# EAGLE board Mosfet H-Bridge (EAGLE 7.6.0)
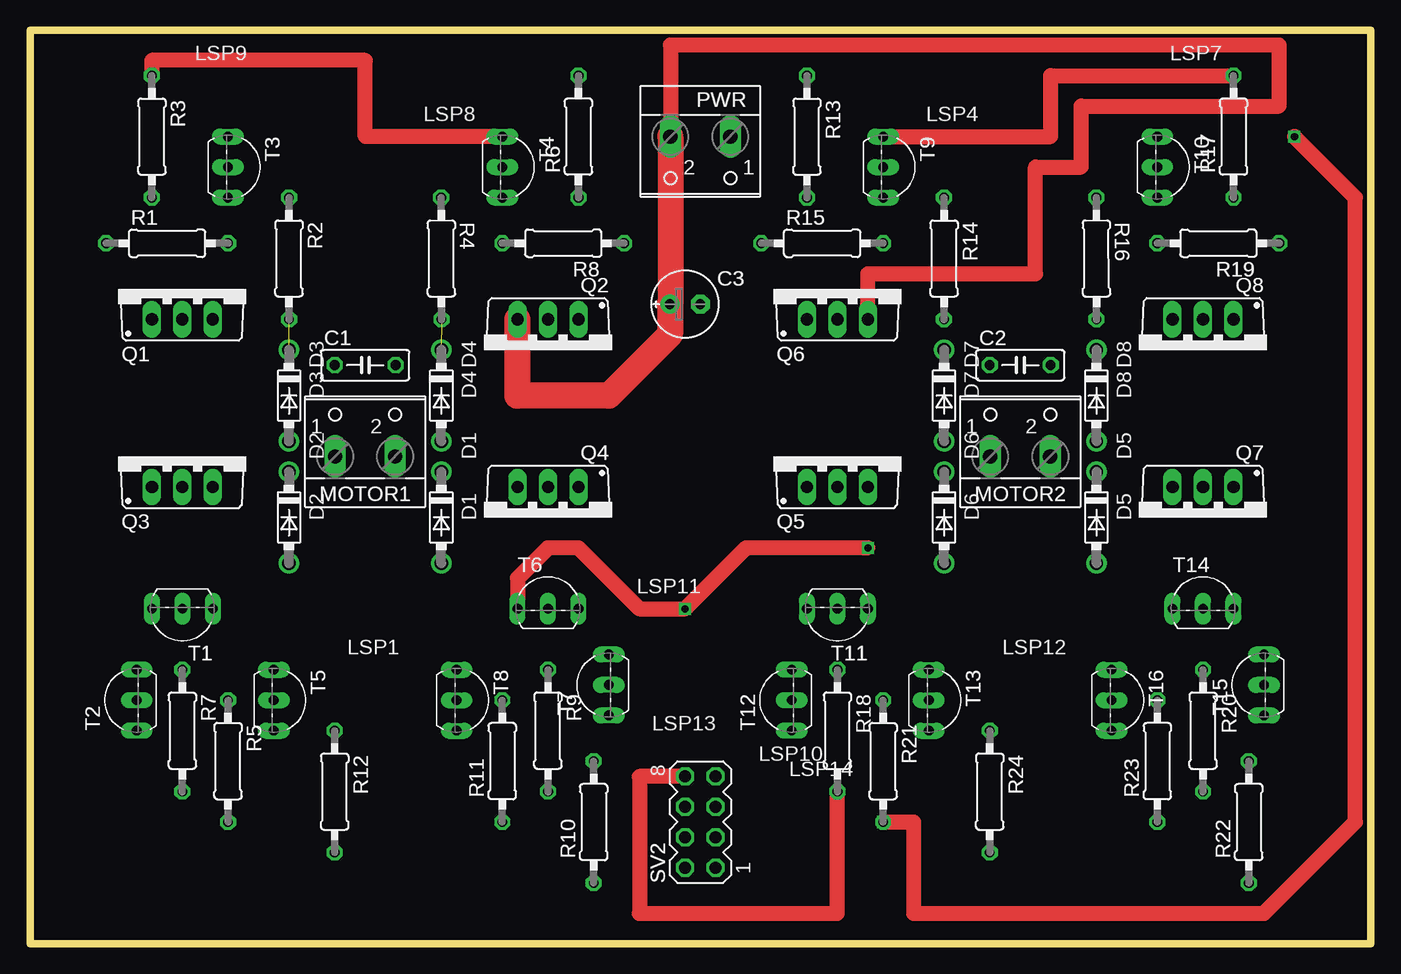
[diagram p0: board, top side]
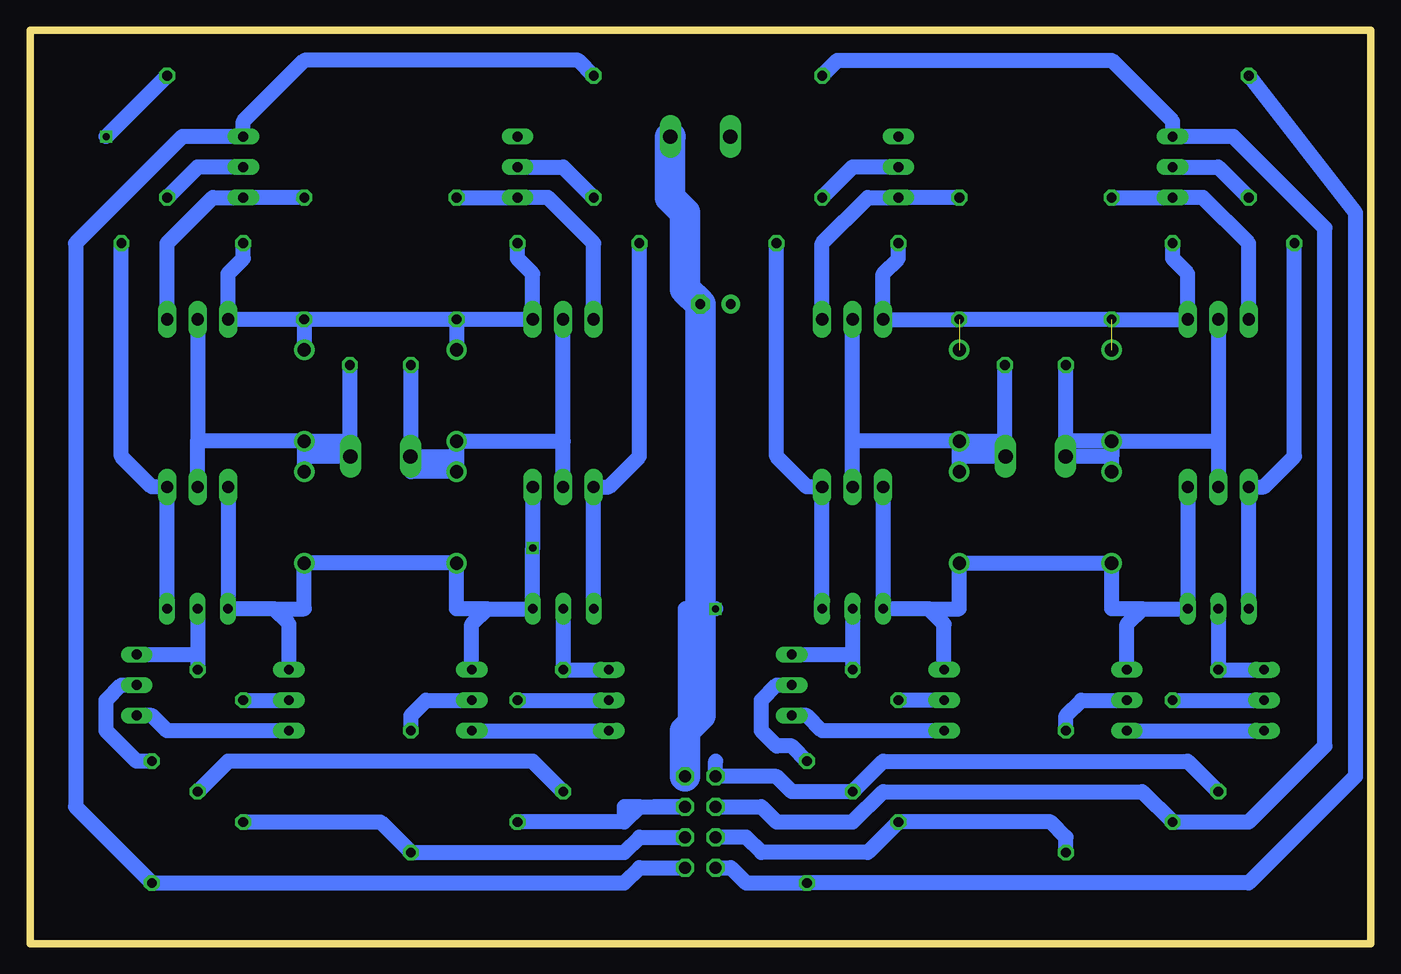
[diagram p1: board, bottom side, seen from below]

Size 111.76 x 76.2 mm. Coordinates in mm from the lower left corner, seen from the top.
Outline: 0,76.2 0,0 111.76,0 111.76,76.2 0,76.2
Copper layers (1*16): Top 0.035mm / dielectric 1.5mm / Bottom 0.035mm
Design rules "default": minimum track width 10mil, minimum drill 24mil, track to track 8mil, track to pad 8mil, pad to pad 8mil, via to via 8mil, smd to smd 8mil, copper to edge 40mil, drill to drill 8mil, minimum pad ring 10mil, minimum via ring 8mil, stop-mask expansion 4mil, vias tented up to drill 0mil, thermal gap 10mil
Net classes: 1 Thick: width 1.016 mm, drill 0.508 mm, clearance 0.508 mm

## Footprints (pad centres in the part's own frame; a part is rotated, then mirrored left to right if it is on the bottom)
C050-025X075 = drill 0.813 octagon: 1 -2.54,0; 2 2.54,0
E2,5-6E = drill 0.813 pad 1.575: + -1.27,0 | drill 0.813 pad 1.575 octagon: - 1.27,0
DO41-7.6 = drill 1.1 pad 1.7: A 3.81,0; C -3.81,0
W237-102 = drill 1.194 long: 1 -2.5,-1.27; 2 2.5,-1.27
TO220BV = drill 1.016 long: D 0,-2.54; G -2.54,-2.54; S 2.54,-2.54
0207/10 = drill 0.813 octagon: 1 -5.08,0; 2 5.08,0
MA04-2 = drill 1.016 octagon: 1 -3.81,-1.27; 2 -3.81,1.27; 3 -1.27,-1.27; 4 -1.27,1.27; 5 1.27,-1.27; 6 1.27,1.27; 7 3.81,-1.27; 8 3.81,1.27
TO92-EBC = drill 0.813 long: B 0,-1.27; C 2.54,-1.27; E -2.54,-1.27

## Placement (x,y rotation side)
C1  [C050-025X075]  27.94,48.26 0 top
C2  [C050-025X075]  82.55,48.26 0 top
C3  [E2,5-6E]  54.61,53.34 0 top
D1  1N5817-B  [DO41-7.6]  34.29,35.56 270 top
D2  1N5817-B  [DO41-7.6]  21.59,35.56 270 top
D3  1N5817-B  [DO41-7.6]  21.59,45.72 270 top
D4  1N5817-B  [DO41-7.6]  34.29,45.72 270 top
D5  1N5817-B  [DO41-7.6]  88.9,35.56 270 top
D6  1N5817-B  [DO41-7.6]  76.2,35.56 270 top
D7  1N5817-B  [DO41-7.6]  76.2,45.72 270 top
D8  1N5817-B  [DO41-7.6]  88.9,45.72 270 top
MOTOR1  [W237-102]  27.94,41.91 0 top
MOTOR2  [W237-102]  82.55,41.91 0 top
PWR  [W237-102]  55.88,66.04 180 top
Q1  IRF9640  [TO220BV]  12.7,54.61 0 top
Q2  IRF9640  [TO220BV]  43.18,49.53 180 top
Q3  IRF530N  [TO220BV]  12.7,40.64 0 top
Q4  IRF530N  [TO220BV]  43.18,35.56 180 top
Q5  IRF530N  [TO220BV]  67.31,40.64 0 top
Q6  IRF9640  [TO220BV]  67.31,54.61 0 top
Q7  IRF530N  [TO220BV]  97.79,35.56 180 top
Q8  IRF9640  [TO220BV]  97.79,49.53 180 top
R1  10K  [0207/10]  11.43,58.42 0 top
R2  10K  [0207/10]  21.59,57.15 270 top
R3  10K  [0207/10]  10.16,67.31 270 top
R4  10K  [0207/10]  34.29,57.15 270.1 top
R5  10K  [0207/10]  16.51,15.24 270 top
R6  10K  [0207/10]  45.72,67.31 90 top
R7  10K  [0207/10]  12.7,17.78 270 top
R8  10K  [0207/10]  44.45,58.42 180 top
R9  10K  [0207/10]  43.18,17.78 270 top
R10  10K  [0207/10]  46.99,10.16 90 top
R11  10K  [0207/10]  39.37,15.24 90 top
R12  10K  [0207/10]  25.4,12.7 270 top
R13  10K  [0207/10]  64.77,67.31 270 top
R14  10K  [0207/10]  76.2,57.15 270 top
R15  10K  [0207/10]  66.04,58.42 0 top
R16  10K  [0207/10]  88.9,57.15 270.1 top
R17  10K  [0207/10]  100.33,67.31 90 top
R18  10K  [0207/10]  67.31,17.78 270 top
R19  10K  [0207/10]  99.06,58.42 180 top
R20  10K  [0207/10]  97.79,17.78 270 top
R21  10K  [0207/10]  71.12,15.24 270 top
R22  10K  [0207/10]  101.6,10.16 90 top
R23  10K  [0207/10]  93.98,15.24 90 top
R24  10K  [0207/10]  80.01,12.7 270 top
SV2  [MA04-2]  55.88,10.16 90 top
T1  [TO92-EBC]  12.7,26.67 180 top
T2  [TO92-EBC]  7.62,20.32 90 top
T3  [TO92-EBC]  17.78,64.77 270 top
T4  [TO92-EBC]  40.64,64.77 270 top
T5  [TO92-EBC]  21.59,20.32 270 top
T6  [TO92-EBC]  43.18,29.21 0 top
T7  [TO92-EBC]  46.99,21.59 90 top
T8  [TO92-EBC]  36.83,20.32 270 top
T9  [TO92-EBC]  72.39,64.77 270 top
T10  [TO92-EBC]  95.25,64.77 270 top
T11  [TO92-EBC]  67.31,26.67 180 top
T12  [TO92-EBC]  62.23,20.32 90 top
T13  [TO92-EBC]  76.2,20.32 270 top
T14  [TO92-EBC]  97.79,29.21 0 top
T15  [TO92-EBC]  101.6,21.59 90 top
T16  [TO92-EBC]  91.44,20.32 270 top

## Library data of the parts
C1-C3 R1-R24 = rcl
D1-D8 = diode
MOTOR1 MOTOR2 PWR = con-wago-500; MPN: 237-102; OC_FARNELL: unknown; OC_NEWARK: 70K9898
Q1-Q8 = transistor-power
SV2 = con-lstb; OC_FARNELL: unknown; OC_NEWARK: unknown
T1-T16 = transistor

## Nets
1A: R3.1 R10.1 SV2.2 T4.E
1B: R5.2 R6.2 SV2.6 T3.E
2A: R13.1 R22.1 SV2.1 T10.E
2B: R17.2 R21.2 SV2.5 T9.E
+5V: R7.2 R9.2 R18.2 R20.2 SV2.8
+12V [Thick]: C3.+ D3.C D4.C D7.C D8.C PWR.2 Q1.S Q2.S Q6.S Q8.S R1.2 R2.2 R4.2 R8.2 R14.2 R15.2 R16.2 R19.2
ENABLE1: R11.1 R12.2 SV2.4
ENABLE2: R23.1 R24.2 SV2.3
GND [Thick]: C3.- D1.A D2.A D5.A D6.A PWR.1 Q3.S Q4.S Q5.S Q7.S SV2.7 T1.E T5.E T6.E T8.E T11.E T13.E T14.E T16.E
N$1: R3.2 T3.B
N$2: Q1.G R2.1 T3.C
N$3 [Thick]: C1.1 D2.C D3.A MOTOR1.1 Q1.D Q3.D
N$4: Q2.G R4.1 T4.C
N$5: R6.1 T4.B
N$6: Q3.G R1.1 T1.C
N$7 [Thick]: C1.2 D1.C D4.A MOTOR1.2 Q2.D Q4.D
N$8: R7.1 T1.B T2.C
N$9: T2.E T5.C
N$10: Q4.G R8.1 T6.C
N$11: R9.1 T6.B T7.C
N$12: Q6.G R14.1 T9.C
N$13: T7.E T8.C
N$14 [Thick]: C2.1 D6.C D7.A MOTOR2.1 Q5.D Q6.D
N$15: Q8.G R16.1 T10.C
N$16 [Thick]: C2.2 D5.C D8.A MOTOR2.2 Q7.D Q8.D
N$17: R13.2 T9.B
N$18: R17.1 T10.B
N$19: Q5.G R15.1 T11.C
N$20: R18.1 T11.B T12.C
N$21: R5.1 T2.B
N$22: R10.2 T7.B
N$23: R11.2 T8.B
N$24: R12.1 T5.B
N$25: T12.E T13.C
N$26: Q7.G R19.1 T14.C
N$27: R20.1 T14.B T15.C
N$28: T15.E T16.C
N$29: R21.1 T12.B
N$30: R22.2 T15.B
N$31: R23.2 T16.B
N$32: R24.1 T13.B

## Tracks (layer width: path | path; a pad name or v marks a point on that pad's centre or on a via)
1A  (1 unrouted)
  Top 1.27: T4.E 27.94,67.31 27.94,73.66 10.16,73.66 R3.1
  Bottom 1.27: SV2.2 53.34,6.35 52.07,5.08 R10.1 10.16,5.08 1.27,13.97 1.27,60.96 R3.1
1B
  Bottom 1.27: SV2.6 50.8,11.43 49.53,10.16 43.18,10.16 40.64,12.7 19.05,12.7 R5.2 10.16,10.16 3.81,16.51 3.81,59.69 11.43,67.31 T3.E 16.51,68.58 21.59,73.66 44.45,73.66 R6.2
2A
  Bottom 1.27: SV2.1 60.96,6.35 62.23,5.08 R22.1 107.95,11.43 107.95,58.42 99.06,67.31 T10.E 93.98,68.58 88.9,73.66 66.04,73.66 R13.1
2B  (via drill 0.6)
  Top 1.27: T9.E 85.09,67.31 85.09,72.39 R17.2 | R21.2 73.66,10.16 73.66,2.54 102.87,2.54 110.49,10.16 110.49,62.23 v105.41,67.31
  Bottom 1.27: 62.23,10.16 60.96,11.43 | 60.96,11.43 SV2.5 59.69,11.43 | 60.96,11.43 62.23,11.43 62.23,10.16 | 62.23,10.16 R21.2 | v105.41,67.31 R17.2
  other vias: 71.12,10.16
+5V
  Top 1.27: SV2.8 50.8,13.97 50.8,2.54 67.31,2.54 R18.2
  Bottom 1.27: R7.2 15.24,15.24 40.64,15.24 R9.2 48.26,12.7 49.53,13.97 SV2.8 54.61,15.24 | R18.2 69.85,15.24 95.25,15.24 R20.2
+12V  (2 unrouted)
  Top 1.27: Q6.S 69.85,55.88 83.82,55.88 83.82,64.77 87.63,64.77 87.63,69.85 104.14,69.85 104.14,74.93 53.38,74.93 PWR.2
  Top 2.184: PWR.2 53.38,53.38 C3.+ 53.34,50.8 48.26,45.72 40.64,45.72 Q2.S
  Bottom 1.27: R8.2 39.37,57.15 40.64,55.88 Q2.S R4.2 | R1.2 16.51,57.15 15.24,55.88 Q1.S R2.2 R4.2 | Q8.S 95.25,55.88 93.98,57.15 R19.2 | R15.2 71.12,57.15 69.85,55.88 Q6.S R14.2 | R14.2 R16.2 | R16.2 | R16.2 Q8.S | Q8.S | R16.2 D8.C | R14.2 D7.C | R4.2
ENABLE1
  Bottom 1.27: R12.2 25.4,8.89 26.67,10.16 R11.1 41.91,7.62 50.8,7.62 52.07,8.89 SV2.4
ENABLE2
  Bottom 1.27: R23.1 82.55,10.16 R24.2 62.23,7.62 60.96,8.89 SV2.3
GND  (via drill 0.6)
  Top 1.27: T6.E 40.64,30.48 43.18,33.02 45.72,33.02 50.8,27.94 v54.61,27.94 59.69,33.02 v69.85,33.02
  Bottom 1.27: Q3.S T1.E 19.05,27.94 | Q4.S T6.E 36.83,27.94 | T5.E 20.32,26.67 19.05,27.94 | T8.E 35.56,26.67 36.83,27.94 | Q5.S v69.85,33.02 T11.E 73.66,27.94 | Q7.S T14.E 91.44,27.94 | T13.E 74.93,26.67 73.66,27.94 | T16.E 90.17,26.67 91.44,27.94 | v54.61,27.94 57.15,27.94 SV2.7 | 91.44,27.94 88.9,27.94 D5.A D6.A 76.2,27.94 73.66,27.94 | 36.83,27.94 34.29,27.94 D1.A D2.A 21.59,27.94 19.05,27.94
  Bottom 2.54: SV2.7 57.15,17.78 55.88,19.05 C3.- 57.15,54.61 57.15,60.96 58.42,62.23 58.42,67.27 PWR.1
N$1
  Bottom 1.27: T3.B 12.7,64.77 R3.2
N$2
  Bottom 1.27: Q1.G 10.16,58.42 13.97,62.23 T3.C R2.1
N$3
  Bottom 1.27: Q1.D 12.7,41.91 | 12.7,41.91 Q3.D | D2.C 21.59,40.64 | D3.A 21.59,40.64 | 21.59,40.64 MOTOR1.1 | D3.A 12.7,41.91 | D3.A 25.4,41.91 C1.1
N$4
  Bottom 1.27: Q2.G 45.72,58.42 41.91,62.23 T4.C | R4.1 T4.C | T4.C
N$5
  Bottom 1.27: T4.B 43.18,64.77 R6.1
N$6
  Bottom 1.27: R1.1 6.35,40.64 8.89,38.1 Q3.G T1.C
N$7
  Bottom 1.27: MOTOR1.2 34.29,40.64 | Q4.D 43.18,41.91 | 43.18,41.91 Q2.D | D4.A 30.48,41.91 C1.2 | D1.C 34.29,40.64 | 34.29,40.64 D4.A | D4.A 43.18,41.91
N$8
  Bottom 1.27: T1.B R7.1 T2.C
N$9
  Bottom 1.27: T5.C T2.E
N$10
  Bottom 1.27: R8.1 49.53,40.64 46.99,38.1 Q4.G T6.C
N$11
  Bottom 1.27: T6.B 43.18,24.13 | 43.18,24.13 R9.1 | T7.C 43.18,24.13
N$12
  Bottom 1.27: Q6.G 64.77,58.42 68.58,62.23 T9.C R14.1
N$13
  Bottom 1.27: T8.C 45.72,17.78 46.99,19.05 T7.E
N$14
  Bottom 1.27: D7.A 76.2,40.64 | 76.2,40.64 D6.C | MOTOR2.1 76.2,40.64 | D6.C 80.01,39.37 C2.1 | Q5.D 67.31,41.91 | 67.31,41.91 Q6.D | D6.C D7.A | D7.A 67.31,41.91
N$15
  Bottom 1.27: Q8.G 100.33,58.42 96.52,62.23 T10.C | R16.1 T10.C | T10.C
N$16
  Bottom 1.27: D8.A 88.9,40.64 | 88.9,40.64 D5.C | MOTOR2.2 88.9,40.64 | D8.A 85.09,41.91 C2.2 | Q8.D 97.79,41.91 | Q7.D 97.79,41.91 | D8.A 97.79,41.91
N$17
  Bottom 1.27: T9.B 67.31,64.77 R13.2
N$18
  Bottom 1.27: T10.B 97.79,64.77 R17.1
N$19
  Bottom 1.27: R15.1 60.96,40.64 63.5,38.1 Q5.G T11.C
N$20
  Bottom 1.27: T11.B R18.1 T12.C
N$21
  Bottom 1.27: R5.1 T2.B
N$22
  Bottom 1.27: R10.2 48.26,16.51 49.53,16.51 50.8,17.78 50.8,20.32 49.53,21.59 T7.B
N$23
  Bottom 1.27: T8.B R11.2
N$24
  Bottom 1.27: R12.1 25.4,19.05 24.13,20.32 T5.B
N$25
  Bottom 1.27: T13.C T12.E
N$26
  Bottom 1.27: R19.1 104.14,40.64 101.6,38.1 Q7.G T14.C
N$27
  Bottom 1.27: T14.B 97.79,24.13 | 97.79,24.13 R20.1 | T15.C 97.79,24.13
N$28
  Bottom 1.27: T16.C 100.33,17.78 101.6,19.05 T15.E
N$29
  Bottom 1.27: R21.1 T12.B
N$30
  Bottom 1.27: R22.2 102.87,15.24 105.41,17.78 105.41,20.32 104.14,21.59 T15.B
N$31
  Bottom 1.27: R23.2 T16.B
N$32
  Bottom 1.27: R24.1 80.01,19.05 78.74,20.32 T13.B

## Text on the board
_tNames: LSP9 | LSP7 | R3 | PWR | R13 | LSP8 | LSP4 | T3 | T4 | T9 | T10 | R6 | R17 | R1 | R2 | R4 | R15 | R14 | R16 | R8 | R19 | Q2 | Q8 | C3 | D3 | C1 | D4 | D7 | C2 | D8 | Q1 | Q6 | D2 | D1 | D6 | D5 | Q4 | Q7 | MOTOR1 | MOTOR2 | Q3 | Q5 | T6 | T14 | LSP11 | T1 | T11 | LSP1 | LSP12 | T5 | T8 | T13 | T16 | R7 | R9 | R18 | R20 | T7 | T15 | T2 | R5 | LSP13 | T12 | R21 | R12 | R24 | LSP10 | LSP14 | R11 | R23 | R10 | R22 | SV2
_tValues: LSP13